# Altium PCB Fri3d_2026_Keeb_00.PcbDoc (part 2 of 2)
Units mm, origin at the board's own origin, x right, y up, seen from the top; angles counter-clockwise.
Board outline 99 x 106 mm, 2 copper layers (Top Layer, Bottom Layer), stack 1.571 mm thick; 46 components, 52 nets, 333 pads, 191 vias.
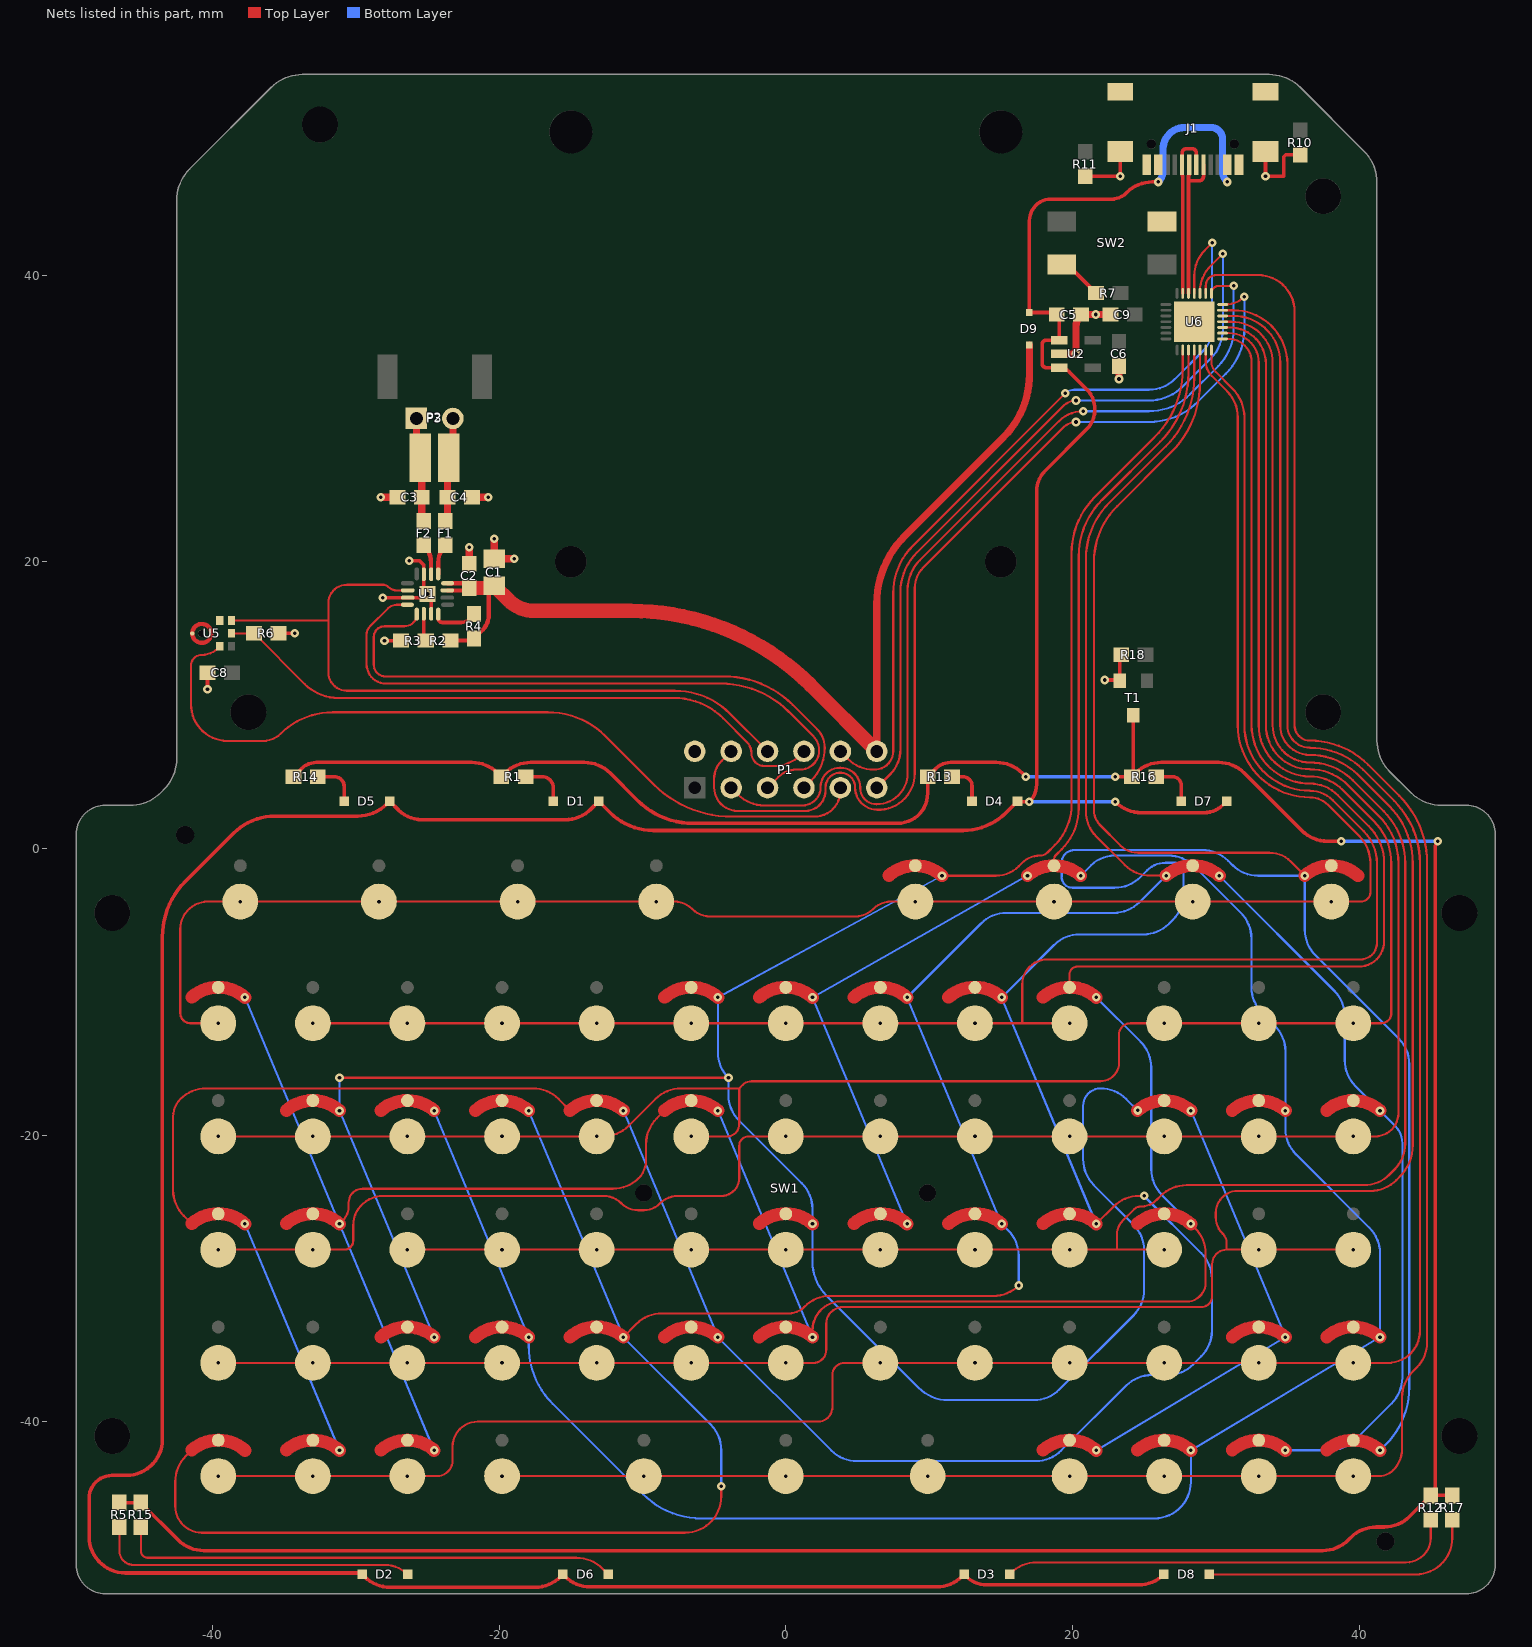
[diagram p2: the nets of this part, all layers, seen from the top]

## Via types
v1: diameter 0.6, hole 0.25, Top Layer to Bottom Layer, 191 vias

## Nets (pads, with @x,y where several pads share a name; then routed paths per layer and width w, separated by ;. In a path a pad name is that pad's centre, name@x,y a point inside that pad or via, vN(x,y) a via of type N, cw(c..) or ccw(c..) an arc to the next point about the centre after c; other vN are vias at no path point) (continued)
COL4: SW1.9 SW1.27 SW1.45 SW1.63 SW1.81 SW1.99 SW1.117 SW1.135 U6.9 | length 214.5
  Top Layer w0.15: v1(-31.138,-16) v1(-4,-16) ; v1(10.902,-1.91) 14.656,-1.91 ccw(c14.656,0.344) 16.25,-1.25 16.47,-1.03 cw(c17.75,-2.311) 17.75,-0.5 ccw(c17.75,0.222) 18.26,-0.289 18.756,0.207 ccw(c15.898,3.065) 19.94,3.065 19.94,20.6 cw(c25.484,20.6) 21.564,24.52 25.719,28.675 ccw(c20.935,33.459) 27.7,33.459 U6.9@27.7,34.775
  Bottom Layer w0.15: v1(-31.138,-16) v1(-31.138,-18.3) v1(-24.538,-34.1) ; v1(10.902,-1.91) v1(-4.738,-10.4) -4.738,-14.219 ccw(c-2.219,-14.219) v1(-4,-16) -4,-17.198 ccw(c-1.46,-17.198) -3.256,-18.994 1.118,-23.368 cw(c-0.678,-25.164) 1.862,-25.164 v1(1.862,-26.2) 1.862,-28.821 ccw(c5.28,-28.821) 2.863,-31.238 9.263,-37.638 ccw(c11.345,-35.556) 11.345,-38.5 17.295,-38.5 ccw(c17.295,-35.96) 19.091,-37.756 24.256,-32.591 ccw(c22.46,-30.795) 25,-30.795 25,-28.052 ccw(c22.46,-28.052) 24.256,-26.256 21.494,-23.494 cw(c23.29,-21.698) 20.75,-21.698 20.75,-17.96 cw(c21.96,-17.96) 21.96,-16.75 cw(c21.96,-19.29) 23.756,-17.494 v1(24.549,-18.287) ; v1(21.662,-42) v1(34.862,-34.1) v1(28.262,-18.3)
COL5: SW1.11 SW1.29 SW1.47 SW1.65 SW1.83 SW1.101 SW1.119 SW1.137 U6.10 | length 208.7
  Top Layer w0.15: SW1.11@18.715,-1.209 18.715,-1.2 18.715,-0.787 cw(c19.173,-0.787) 18.849,-0.463 19.256,-0.056 ccw(c16.398,2.802) 20.44,2.802 20.44,20.393 cw(c25.984,20.393) 22.064,24.313 26.119,28.368 ccw(c21.335,33.152) 28.1,33.152 U6.10@28.1,34.775
  Bottom Layer w0.15: v1(-24.538,-18.3) v1(-17.938,-34.1) -17.938,-34.71 ccw(c-12.215,-34.71) -16.262,-38.757 -9.945,-45.074 ccw(c-5.898,-41.027) -5.898,-46.75 25.722,-46.75 ccw(c25.722,-44.21) 28.262,-44.21 v1(28.262,-42) v1(41.462,-34.1) 41.462,-28.264 ccw(c38.922,-28.264) 40.718,-26.468 35.606,-21.356 cw(c37.402,-19.56) 34.862,-19.56 v1(34.862,-18.3) 34.862,-14.164 ccw(c32.322,-14.164) 34.118,-12.368 33.238,-11.488 cw(c35.034,-9.692) 32.494,-9.692 32.494,-6.297 ccw(c29.954,-6.297) 31.75,-4.5 28.494,-1.244 ccw(c26.698,-3.04) 26.698,-0.5 22.948,-0.5 ccw(c22.948,-2.819) 21.308,-1.179 v1(20.577,-1.91) ; v1(8.462,-26.2) v1(1.862,-10.4) v1(16.864,-1.896)
COL6: SW1.13 SW1.31 SW1.49 SW1.67 SW1.85 SW1.103 SW1.121 SW1.139 U6.11 | length 241
  Top Layer w0.15: -41.451,-41.987 -41.861,-42.396 ccw(c-40.065,-44.192) -42.605,-44.192 -42.605,-45.895 ccw(c-40.75,-45.895) -40.75,-47.75 -7.04,-47.75 ccw(c-7.04,-45.21) -4.5,-45.21 v1(-4.5,-44.5) ; v1(-11.338,-34.1) -10.428,-33.19 cw(c-8.632,-34.986) -8.632,-32.446 0.213,-32.446 ccw(c0.213,-30.943) 1.276,-32.006 1.312,-31.97 cw(c3.108,-33.766) 3.108,-31.226 14.498,-31.226 ccw(c14.498,-28.748) v1(16.25,-30.5) ; v1(26.539,-1.897) 25.449,-1.897 cw(c25.449,0.643) 23.653,-1.153 21.684,0.816 cw(c23.48,2.612) 20.94,2.612 20.94,20.186 cw(c26.484,20.186) 22.564,24.106 26.519,28.061 ccw(c21.735,32.844) 28.5,32.844 U6.11@28.5,34.775 ; SW1.13@28.39,-1.209 SW1.13@28.39,-1.2
  Bottom Layer w0.15: v1(-17.938,-18.3) v1(-11.338,-34.1) -5.244,-40.194 cw(c-7.04,-41.99) -4.5,-41.99 v1(-4.5,-44.5) ; v1(16.25,-30.5) 16.25,-28.44 ccw(c13.71,-28.44) 15.506,-26.644 v1(15.062,-26.2) v1(8.462,-10.4) 13.618,-5.244 cw(c15.415,-7.04) 15.415,-4.5 22.883,-4.5 ccw(c22.883,-1.96) 24.679,-3.756 v1(26.539,-1.897) ; v1(30.252,-1.91) 38.256,-9.914 cw(c36.46,-11.71) 39,-11.71 39,-14.786 ccw(c41.54,-14.786) 39.744,-16.582 v1(41.462,-18.3) 42.506,-19.344 cw(c41.265,-20.585) 43.02,-20.585 43.02,-24.028 43.025,-24.033 43.025,-24.467 43.02,-24.472 43.02,-36.928 cw(c40.48,-36.928) 42.276,-38.724 39.744,-41.256 cw(c37.948,-39.46) 37.948,-42 v1(34.862,-42)
COL7: SW1.15 SW1.33 SW1.51 SW1.69 SW1.87 SW1.105 SW1.123 SW1.141 U6.12 | length 287
  Top Layer w0.15: -41.451,-26.187 -42.006,-25.632 cw(c-40.21,-23.836) -42.75,-23.836 -42.75,-18.716 cw(c-41.022,-18.716) -42.244,-17.494 cw(c-40.448,-19.29) -40.448,-16.75 -17.64,-16.75 cw(c-17.64,-19.29) -15.844,-17.494 -15.051,-18.287 ; v1(21.662,-26.2) 22.868,-24.994 cw(c24.665,-26.79) 24.665,-24.25 v1(25,-24.25) ; U6.12@28.9,34.775 28.9,32.452 cw(c22.135,32.452) 26.919,27.669 23.124,23.874 ccw(c27.044,19.953) 21.5,19.953 21.5,2.696 ccw(c23.053,2.696) 21.955,1.598 23.344,0.209 ccw(c24.573,1.439) 24.573,-0.3 33.752,-0.3 cw(c33.752,-2.388) 35.229,-0.912 v1(36.214,-1.897) ; SW1.15@38.056,-1.2 SW1.15@38.065,-1.209
  Bottom Layer w0.15: v1(-37.738,-26.2) v1(-31.138,-42) ; v1(-11.338,-18.3) v1(-4.738,-34.1) 3.168,-42.006 ccw(c4.964,-40.21) 4.964,-42.75 17.433,-42.75 ccw(c17.433,-40.21) 19.229,-42.006 23.741,-37.494 cw(c25.537,-39.29) 25.537,-36.75 26.63,-36.75 ccw(c26.63,-34.21) 28.426,-36.006 28.992,-35.44 ccw(c27.196,-33.644) 29.736,-33.644 29.736,-30.038 ccw(c27.196,-30.038) 28.992,-28.242 v1(25,-24.25) ; v1(21.662,-26.2) v1(15.062,-10.4) 18.718,-6.744 cw(c20.515,-8.54) 20.515,-6 24.948,-6 ccw(c24.948,-3.46) 26.744,-5.256 27.006,-4.994 ccw(c25.21,-3.198) 27.75,-3.198 27.75,-1.618 ccw(c27.132,-1.618) 27.132,-1 26.5,-1 ccw(c26.5,-2.811) 25.22,-1.53 24.744,-2.006 cw(c22.948,-0.21) 22.948,-2.75 20,-2.75 cw(c20,-2) 19.25,-2 19.25,-1 cw(c20.132,-1) 20.132,-0.118 29.066,-0.118 cw(c29.066,-2.658) 30.862,-0.862 31.166,-1.166 ccw(c32.962,0.63) 32.962,-1.91 v1@36.214,-1.91 ; v1(36.214,-1.897) v1@36.214,-1.91 ; v1(41.462,-42) 41.843,-41.619 ccw(c37.829,-37.605) 43.506,-37.605 43.506,-15.058 ccw(c40.966,-15.058) 42.762,-13.262 36.958,-7.458 cw(c38.754,-5.662) 36.214,-5.662 v1@36.214,-1.91
COL8: SW1.17 SW1.35 SW1.53 SW1.71 SW1.89 SW1.107 SW1.125 U6.15 | length 204.3
  Top Layer w0.15: v1(-31.138,-26.2) -30.898,-25.96 ccw(c-31.858,-25) -30.5,-25 -30.5,-24.707 cw(c-29.543,-24.707) -29.543,-23.75 -12.052,-23.75 ccw(c-12.052,-21.21) -10.256,-23.006 ccw(c-11.478,-21.784) -9.75,-21.784 -9.75,-20.637 cw(c-7.21,-20.637) -9.006,-18.841 -8.451,-18.287 ; v1(1.862,-34.1) 1.862,-33.638 cw(c3.9,-33.638) 3.584,-31.625 27.971,-31.625 ccw(c27.971,-30.301) 29.294,-30.301 29.294,-28.284 ccw(c26.754,-28.284) 28.55,-26.488 v1(28.262,-26.2) ; SW1.35@19.8,-9.699 19.8,-9.69 19.8,-8.79 cw(c20.34,-8.79) 20.34,-8.25 39.978,-8.25 ccw(c39.978,-6.478) 41.75,-6.478 41.75,-1.028 ccw(c38.11,-1.028) 40.684,1.546 38.515,3.715 ccw(c36.569,1.769) 36.569,4.521 cw(c36.569,8.59) 32.5,8.59 32.5,33.937 ccw(c30.887,33.937) 30.887,35.55 U6.15@30.475,35.55
  Bottom Layer w0.15: v1(-37.738,-10.4) v1(-31.138,-26.2) v1(-24.538,-42) ; v1(-4.738,-18.3) v1(1.862,-34.1) ; v1(21.662,-10.4) 24.756,-13.494 cw(c22.96,-15.29) 25.5,-15.29 25.5,-22.386 ccw(c28.04,-22.386) 26.244,-24.182 v1(28.262,-26.2)
ESP.IO2: P1.5 U1.16 | length 45
  Top Layer w0.15: U1.16@-26.4,17 -27.146,17 ccw(c-27.146,16.146) -27.75,16.75 -29.021,15.479 ccw(c-28.469,14.927) -29.25,14.927 -29.25,12.85 ccw(c-27.9,12.85) -27.9,11.5 -4.546,11.5 cw(c-4.546,4.749) 0.227,9.523 1.897,7.853 cw(c0.869,6.824) 2.323,6.824 cw(c0.999,6.824) 0.999,5.5 0.75,5.5 ccw(c0.75,3.689) -0.53,4.97 P1.5@-1.27,4.23
ESP.IO15: P1.8 R6.1 U5.6 | length 44.1
  Top Layer w0.15: U5.6@-38.676,15 R6.1@-37.1,15 -33.554,11.455 ccw(c-31.25,13.759) -31.25,10.5 -8.898,10.5 -7.811,10.5 cw(c-7.811,5.641) -4.375,9.077 -2.716,7.418 cw(c-3.487,6.646) -2.396,6.646 ccw(c-1.5,6.646) -1.5,5.75 -0.802,5.75 ccw(c-0.802,8.29) 0.994,6.494 P1.8@1.27,6.77
ESP.IO16: P1.7 U1.1 | length 43.2
  Top Layer w0.15: U1.1@-25.75,16.35 cw(c-26.6,16.35) -26.6,15.5 -28,15.5 ccw(c-28,14.75) -28.75,14.75 -28.75,12.81 ccw(c-27.94,12.81) -27.94,12 -4.296,12 cw(c-4.296,5.249) 0.477,10.023 2.189,8.311 cw(c0.907,7.029) 2.72,7.029 cw(c-0.537,7.029) 1.766,4.726 P1.7@1.27,4.23
ESP.IO17: P1.9 U5.4 | length 56.3
  Top Layer w0.15: U5.4@-39.498,14.1 -39.637,13.961 cw(c-40.75,15.074) -40.75,13.5 ccw(c-40.75,12.75) -41.5,12.75 -41.5,10.04 ccw(c-38.96,10.04) -38.96,7.5 -36.457,7.5 ccw(c-36.457,9.207) -35.25,8 cw(c-31.629,4.379) -31.629,9.5 -16.603,9.5 cw(c-16.603,3.818) -12.586,7.836 -9.237,4.487 ccw(c-3.75,9.975) -3.75,2.214 1.994,2.214 ccw(c1.994,4.032) P1.9@3.801,4.229
ESP.IO43: P1.3 U6.22 | length 65.9
  Top Layer w0.15: P1.3@-3.81,4.23 -3.324,3.744 ccw(c-1.528,5.54) -1.528,3 1.175,3 ccw(c1.175,4.25) 2.425,4.25 2.425,4.275 cw(c3.775,4.275) 3.775,5.625 3.825,5.625 cw(c3.825,4.25) 5.2,4.25 5.2,4.2 ccw(c6.325,4.2) 6.325,3.075 ccw(c6.325,5.25) 8.5,5.25 8.5,18.041 cw(c11.418,18.041) 9.355,20.105 19.043,29.793 ; 19.043,29.793 cw(c20.75,28.086) v1(20.75,30.5) ; U6.22@29.7,38.725 cw(c30.225,38.725) 30.225,39.25 v1(31.25,39.25)
  Bottom Layer w0.15: v1(20.75,30.5) 25.351,30.5 ccw(c25.351,34.54) 28.208,31.683 30.172,33.647 ccw(c27.569,36.25) 31.25,36.25 v1(31.25,39.25)
ESP.IO44: P1.4 U6.21 | length 70.8
  Top Layer w0.15: P1.4@-3.81,6.77 -4.468,6.112 ccw(c-3.184,4.828) -5,4.828 -5,4.255 ccw(c-3.358,4.255) -3.358,2.614 1.364,2.614 ccw(c1.364,4.02) 2.77,4.02 2.77,4.25 cw(c3.802,4.25) 4.834,4.25 ccw(c6.389,4.25) 6.367,2.695 ; 6.389,2.695 cw(c6.389,4.25) 6.367,2.695 ; v1(20.25,29.75) ccw(c20.25,28.543) 19.396,29.396 9.598,19.598 ccw(c11.042,18.154) 9,18.154 9,5.233 cw(c6.46,5.233) 6.367,2.695 ; U6.21@30.475,37.95 30.672,37.95 ccw(c30.672,39.828) v1(32,38.5)
  Bottom Layer w0.15: v1(20.25,29.75) 25.351,29.75 ccw(c25.351,34.54) 28.738,31.153 30.702,33.117 ccw(c27.569,36.25) 32,36.25 v1(32,38.5)
ESP.IO47: P1.6 U1.14 U5.1 | length 50.9
  Top Layer w0.15: U5.1@-38.676,15.9 -31.92,15.9 ; U1.14@-26.375,18 -27.146,18 cw(c-27.146,18.854) -27.75,18.25 ccw(c-28.112,17.888) -28.112,18.4 -30.626,18.4 ccw(c-30.626,17.106) -31.92,17.106 -31.92,15.9 ; P1.6@-1.27,6.77 -3.926,9.426 ccw(c-7.726,5.625) -7.726,11 -30.63,11 cw(c-30.63,12.29) -31.92,12.29 -31.92,15.9
GND: C1.2 C2.2 C3.2 C4.2 C5.2 C6.2 C8.2 C9.2 J1.A1 J1.A12 J1.B1 J1.B12 J1.MH1 J1.MH2 J1.MH3 J1.MH4 P1.2 R3.2 R6.2 R10.2 R11.2 R18.2 T1.2 U1.3 U1.11 U1.15 U1.17 U2.2 U5.2 U5.3 U6.29 | length 37.2
  Top Layer w0.25: v1(-40.35,11.1) C8.2@-40.35,12.25 ; R6.2@-35.4,15 v1(-34.25,15) ; v1(-28.112,17.5) U1.15@-26.375,17.5 -25.25,17.5 v1(-25,17.75) ; v1(-28,14.5) R3.2@-26.85,14.5 ; v1(-26.283,20.082) -25.586,20.082 -25.25,19.746 U1.11@-25.25,19.125 -25.25,18 v1(-25,17.75) ; U1.3@-24.75,16.375 -24.75,17.5 v1(-25,17.75) ; R11.2@20.9,46.9 v1(23.33,46.9) J1.MH4@23.33,48.618 ; v1(22.25,11.75) T1.2@23.3,11.75 ; T1.2@23.3,11.7 23.3,13.4 cw(c23.4,13.4) R18.2@23.4,13.5 ; J1.MH1@33.47,48.618 v1(33.47,46.9) 34.75,46.9 34.75,48.25 34.9,48.4 R10.2@35.9,48.4
  Top Layer w0.5: v1(-28.25,24.5) C3.2@-27.1,24.5 ; C2.2@-22.087,19.863 v1(-22.087,21.013) ; C4.2@-21.9,24.5 v1(-20.75,24.5) ; v1(-20.337,21.613) C1.2@-20.337,20.213 v1(-18.937,20.213) ; U2.2@19.075,34.5 v1(20.25,34.5) 20.25,36.405 cw(c21.445,36.405) C5.2@20.6,37.25 C9.2@22.65,37.25 ; v1(23.25,32.75) C6.2@23.25,33.65
  other v1: 28.5,36.75 21.625,37.25
I2C.SCL: P1.11 U6.24 | length 54.1
  Top Layer w0.15: P1.11@6.35,4.23 7.272,5.152 ccw(c5.513,6.91) 8,6.91 8,17.892 cw(c11.882,17.892) 9.137,20.637 19.396,30.896 cw(c20.25,30.043) v1(20.25,31.25) ; U6.24@28.9,38.725 28.9,38.848 cw(c31.44,38.848) 29.644,40.644 v1(30.5,41.5)
  Bottom Layer w0.15: v1(20.25,31.25) 25.351,31.25 ccw(c25.351,34.54) 27.678,32.214 29.641,34.177 ccw(c27.569,36.25) 30.5,36.25 v1(30.5,41.5)
I2C.SDA: P1.10 U6.25 | length 56.9
  Top Layer w0.15: P1.10@3.81,6.77 4.336,6.244 ccw(c6.132,8.04) 6.132,5.5 ccw(c6.207,6.791) 7.5,6.791 7.5,17.803 cw(c12.2,17.803) 8.876,21.126 v1(19.5,31.75) ; U6.25@28.5,38.725 28.5,39.948 cw(c31.04,39.948) 29.244,41.744 v1(29.75,42.25)
  Bottom Layer w0.15: v1(19.5,31.75) cw(c20.104,31.146) 20.104,32 25.351,32 ccw(c25.351,34.54) 27.147,32.744 29.111,34.708 ccw(c27.569,36.25) 29.75,36.25 v1(29.75,42.25)
NetD1_2: D1.2 R1.1 | length 3.3
  Top Layer w0.25: R1.1@-18.15,5 -17,5 cw(c-17,4.215) -16.215,4.215 D1.2@-16.215,3.291
NetD2_2: D2.2 R5.1 | length 22.5
  Top Layer w0.15: R5.1@-46.5,-47.35 -46.5,-49 ccw(c-45.5,-49) -45.5,-50 -27.976,-50 cw(c-27.976,-52.25) D2.2@-26.385,-50.659
NetD3_2: D3.2 R12.1 | length 31.9
  Top Layer w0.15: D3.2@15.615,-50.659 15.71,-50.564 cw(c17.506,-52.36) 17.506,-49.82 43.286,-49.82 ccw(c43.286,-48.106) 45,-48.106 R12.1@45,-46.85
NetD4_2: D4.2 R13.1 | length 2.8
  Top Layer w0.25: R13.1@11.6,5 12.362,5 cw(c12.362,4.367) 12.995,4.367 D4.2@12.995,3.291
NetD5_2: D5.2 R14.1 | length 3.3
  Top Layer w0.25: R14.1@-32.65,5 -31.5,5 cw(c-31.5,4.315) -30.815,4.315 D5.2@-30.815,3.291
NetD6_2: D6.2 R15.1 | length 34.9
  Top Layer w0.15: R15.1@-45,-47.35 -45,-49 ccw(c-44.5,-49) -44.5,-49.5 -14.596,-49.5 cw(c-14.596,-52.04) -12.8,-50.244 D6.2@-12.385,-50.659
NetD7_2: D7.2 R16.1 | length 3.2
  Top Layer w0.25: R16.1@25.85,5 27,5 cw(c27,4.405) 27.595,4.405 D7.2@27.595,3.291
NetD8_2: D8.2 R17.1 | length 19.7
  Top Layer w0.15: D8.2@29.555,-50.659 43.96,-50.659 ccw(c43.96,-48.119) 46.5,-48.119 R17.1@46.5,-46.85
NetF1_1: F1.1 U1.9 | length 2.1
  Top Layer w0.3: U1.9@-24.25,19.15 -24.25,19.943 cw(c-22.543,19.943) F1.1@-23.75,21.15
NetF2_1: F2.1 U1.10 | length 2.2
  Top Layer w0.3: F2.1@-25.25,21.15 cw(c-26.457,19.943) -24.75,19.943 U1.10@-24.75,19.125
NetR1_2: R1.2 R5.2 R12.2 R13.2 R14.2 R15.2 R16.2 R17.2 T1.3 | length 233.3
  Top Layer w0.25: R5.2@-46.5,-45.65 R15.2@-45,-45.65 -42.394,-48.256 ccw(c-40.598,-46.46) -40.598,-49 37.448,-49 ccw(c37.448,-46.46) 39.244,-48.256 39.406,-48.094 cw(c41.202,-49.89) 41.202,-47.35 41.748,-47.35 ccw(c41.748,-44.81) 43.544,-46.606 R12.2@45,-45.15 ; R14.2@-34.35,5 -33.774,5.576 cw(c-32.75,4.551) -32.75,6 -21.902,6 cw(c-21.902,3.46) -20.106,5.256 R1.2@-19.85,5 -19.594,5.256 cw(c-17.798,3.46) -17.798,6 -14.052,6 cw(c-14.052,3.46) -12.256,5.256 -10.356,3.356 ccw(c-6.478,7.234) -6.478,1.75 7.813,1.75 ccw(c7.813,3.837) 9.9,3.837 R13.2@9.9,5 10.476,5.576 cw(c11.5,4.551) 11.5,6 14.698,6 cw(c14.698,3.46) 16.494,5.256 v1(16.75,5) ; v1(23,5) R16.2@24.15,5 ; T1.3@24.25,9.3 24.25,5.1 cw(c24.15,5.1) R16.2@24.15,5 ; v1(38.75,0.5) 37.802,0.5 cw(c37.802,3.04) 36.006,1.244 31.994,5.256 ccw(c30.198,3.46) 30.198,6 26.202,6 ccw(c26.202,3.46) 24.406,5.256 R16.2@24.15,5 ; v1(45.5,0.5) ccw(c45.946,0.054) 45.315,0.054 45.315,-44.389 cw(c44.239,-44.389) R12.2@45,-45.15 ; R17.2@46.5,-45.15 R12.2@45,-45.15
  Bottom Layer w0.25: v1(16.75,5) v1(23,5) ; v1(38.75,0.5) v1(45.5,0.5)
NetR2_1: R2.1 R3.1 U1.2 | length 1.9
  Top Layer w0.25: U1.2@-25.25,16.375 -25.25,14.6 R3.1@-25.15,14.5
NetR7_2: R7.2 SW2.1@19.25,40.75 | length 3.2
  Top Layer w0.25: SW2.1@19.25,40.75 cw(c19.25,39.785) 19.933,40.467 R7.2@21.65,38.75
ROW0: SW1.2 SW1.4 SW1.6 SW1.8 SW1.10 SW1.12 SW1.14 SW1.16 SW1.18 U6.13 | length 137.4
  Top Layer w0.15: v1(-39.6,-12.2) -41.55,-12.2 cw(c-41.55,-11.5) -42.25,-11.5 -42.25,-5.645 cw(c-40.315,-5.645) -40.315,-3.71 v1(-38.06,-3.71) v1(-28.385,-3.71) v1(-18.71,-3.71) v1(-9.035,-3.71) -7.788,-3.71 cw(c-7.788,-5.485) -6.533,-4.23 ccw(c-5.277,-2.975) -6.532,-4.231 ccw(c-5.277,-2.975) -5.277,-4.75 4.841,-4.75 ccw(c4.841,-2.975) 6.096,-4.23 cw(c7.352,-5.485) 6.097,-4.229 cw(c7.352,-5.485) 7.352,-3.71 v1(9.04,-3.71) v1(18.715,-3.71) v1(28.39,-3.71) v1(38.065,-3.71) 40.139,-3.71 ccw(c40.139,-3.059) 40.79,-3.059 40.79,-1.028 ccw(c38.11,-1.028) 40.005,0.867 37.836,3.036 ccw(c36.569,1.769) 36.569,3.561 cw(c36.569,8.59) 31.54,8.59 31.54,30.092 ccw(c29,30.092) 30.796,31.888 29.717,32.967 cw(c30.724,33.974) 29.3,33.974 U6.13@29.3,34.775
ROW1: SW1.20 SW1.22 SW1.24 SW1.26 SW1.28 SW1.30 SW1.32 SW1.34 SW1.36 U6.14 | length 128.9
  Top Layer w0.15: v1(-33,-12.2) v1(-26.4,-12.2) v1(-19.8,-12.2) v1(-13.2,-12.2) v1(-6.6,-12.2) v1(0,-12.2) v1(6.6,-12.2) v1(13.2,-12.2) 16.5,-12.2 ; v1(19.8,-12.2) 16.5,-12.2 ; U6.14@29.7,34.775 29.7,33.974 ccw(c30.724,33.974) 30,33.25 31.168,32.082 cw(c29.16,30.074) 32,30.074 32,8.59 ccw(c36.569,8.59) 36.569,4.021 cw(c36.569,1.769) 38.161,3.362 40.33,1.192 cw(c38.11,-1.028) 41.25,-1.028 41.25,-6.606 cw(c40.106,-6.606) 40.106,-7.75 18.25,-7.75 ccw(c18.25,-9.5) 16.5,-9.5 16.5,-12.2
ROW2: SW1.38 SW1.40 SW1.42 SW1.44 SW1.46 SW1.48 SW1.50 SW1.52 SW1.54 U6.16 | length 147
  Top Layer w0.15: v1(-39.6,-20.1) v1(-33,-20.1) v1(-26.4,-20.1) v1(-19.8,-20.1) v1(-13.2,-20.1) -12.758,-20.1 ccw(c-12.758,-17.56) -10.962,-19.356 -9.1,-17.494 cw(c-7.304,-19.29) -7.304,-16.75 -3.25,-16.75 ; v1(-6.6,-20.1) -4.1,-20.1 ccw(c-4.1,-19.25) -3.25,-19.25 -3.25,-16.75 ; U6.16@30.475,35.95 30.935,35.95 cw(c30.935,33.885) 33,33.885 33,8.59 ccw(c36.569,8.59) 36.569,5.021 cw(c36.569,1.769) 38.868,4.069 41.037,1.9 cw(c38.11,-1.028) 42.25,-1.028 42.25,-11.5 cw(c41.55,-11.5) 41.55,-12.2 v1(39.6,-12.2) v1(33,-12.2) v1(26.4,-12.2) 24.05,-12.2 ccw(c24.05,-13) 23.25,-13 23.25,-14.957 cw(c21.957,-14.957) 23.205,-15.295 cw(c21.957,-14.957) 22.295,-16.205 cw(c21.957,-14.957) 21.957,-16.25 -2.396,-16.25 ccw(c-2.396,-17.104) -3,-16.5 -3.25,-16.75
ROW3: SW1.56 SW1.58 SW1.60 SW1.62 SW1.64 SW1.66 SW1.68 SW1.70 SW1.72 U6.17 | length 151.4
  Top Layer w0.15: v1(-39.6,-28) v1(-33,-28) -30.812,-28 ccw(c-30.812,-27.368) -30.18,-27.368 -30.18,-26.321 cw(c-28.109,-26.321) -28.109,-24.25 -12.707,-24.25 cw(c-12.707,-25.957) -11.501,-24.749 ; -11.5,-24.75 ccw(c-10.293,-23.543) -10.293,-25.25 -9.906,-25.25 ccw(c-9.906,-23.667) -8.786,-24.786 -8.75,-24.75 cw(c-7.543,-25.957) -7.543,-24.25 -4.5,-24.25 ccw(c-4.5,-23) -3.25,-23 -3.25,-20.75 cw(c-2.6,-20.75) -2.6,-20.1 v1(0,-20.1) v1(6.6,-20.1) v1(13.2,-20.1) v1(19.8,-20.1) v1(26.4,-20.1) v1(33,-20.1) v1(39.6,-20.1) 41.121,-20.1 ccw(c41.121,-18.471) 42.75,-18.471 42.75,-1.028 ccw(c38.11,-1.028) 41.391,2.253 39.222,4.422 ccw(c36.569,1.769) 36.569,5.521 cw(c36.569,8.59) 33.5,8.59 33.5,33.81 ccw(c30.96,33.81) 30.96,36.35 U6.17@30.475,36.35
ROW4: SW1.74 SW1.76 SW1.78 SW1.80 SW1.82 SW1.84 SW1.86 SW1.88 SW1.90 U6.18 | length 141.5
  Top Layer w0.15: v1(-26.4,-28) v1(-19.8,-28) v1(-13.2,-28) v1(-6.6,-28) v1(0,-28) v1(6.6,-28) v1(13.2,-28) v1(19.8,-28) 23.1,-28 ; 23.528,-25.959 ccw(c24.564,-26.993) 23.1,-26.993 23.1,-28 ; 23.529,-25.958 24.306,-25.181 cw(c24.744,-25.619) 24.744,-25 ccw(c24.744,-23.415) 25.025,-24.975 ccw(c24.744,-23.415) 25.864,-24.536 26.156,-24.244 cw(c27.952,-26.04) 27.952,-23.5 40.331,-23.5 ccw(c40.331,-20.96) 42.127,-22.756 42.477,-22.405 ccw(c40.681,-20.609) 43.221,-20.609 43.221,-1.028 ccw(c38.11,-1.028) 41.724,2.586 39.555,4.755 ccw(c36.569,1.769) 36.569,5.992 cw(c36.569,8.59) 33.971,8.59 33.971,33.873 ccw(c31.094,33.873) 31.094,36.75 U6.18@30.475,36.75 ; v1(26.4,-28) 23.1,-28
ROW5: SW1.92 SW1.94 SW1.96 SW1.98 SW1.100 SW1.102 SW1.104 SW1.106 SW1.108 U6.19 | length 170
  Top Layer w0.15: v1(-39.6,-35.9) v1(-33,-35.9) v1(-26.4,-35.9) v1(-19.8,-35.9) v1(-13.2,-35.9) v1(-6.6,-35.9) v1(0,-35.9) 1.921,-35.9 ccw(c1.921,-34.994) 2.827,-34.994 2.827,-33.173 cw(c4,-33.173) 4,-32 29,-32 ccw(c29,-31.25) 29.75,-31.25 29.75,-29 cw(c30.75,-29) 30.75,-28 ; U6.19@30.475,37.15 31.25,37.15 cw(c31.25,33.9) 34.5,33.9 34.5,8.59 ccw(c36.569,8.59) 36.569,6.521 cw(c36.569,1.769) 39.929,5.129 42.098,2.96 cw(c38.11,-1.028) 43.75,-1.028 43.75,-20.696 cw(c40.603,-20.696) 42.828,-22.922 42.594,-23.156 cw(c40.798,-21.36) 40.798,-23.9 31.545,-23.9 ccw(c31.545,-25.445) 30,-25.445 30,-25.738 ccw(c31.599,-25.738) 30.468,-26.868 30.503,-26.903 cw(c29.905,-27.5) 30.75,-27.5 30.75,-28 ; v1(39.6,-28) v1(33,-28) 30.75,-28
ROW6: SW1.110 SW1.112 SW1.114 SW1.116 SW1.118 SW1.120 SW1.122 SW1.124 SW1.126 U6.20 | length 170
  Top Layer w0.15: v1(-39.6,-43.8) v1(-33,-43.8) v1(-26.4,-43.8) ; SW1.126@-26.4,-43.801 -24.355,-43.801 ccw(c-24.355,-42.696) -23.25,-42.696 -23.25,-41.748 cw(c-21.502,-41.748) -21.502,-40 2.25,-40 ccw(c2.25,-39) 3.25,-39 3.25,-36.75 cw(c4.1,-36.75) 4.1,-35.9 v1(6.6,-35.9) v1(13.2,-35.9) v1(19.8,-35.9) v1(26.4,-35.9) v1(33,-35.9) v1(39.6,-35.9) 42.022,-35.9 ccw(c42.022,-33.672) 44.25,-33.672 44.25,-1.827 44.25,-1.028 ccw(c38.11,-1.028) 42.452,3.314 40.283,5.483 ccw(c36.569,1.769) 36.569,7.021 cw(c36.569,8.59) 35,8.59 35,33.788 ccw(c31.238,33.788) 31.238,37.55 U6.20@30.475,37.55
ROW7: SW1.128 SW1.130 SW1.132 SW1.134 SW1.136 SW1.138 SW1.140 SW1.142 U6.23 | length 157.3
  Top Layer w0.15: SW1.128@-19.8,-43.801 v1(-9.9,-43.801) v1(0,-43.801) v1(9.9,-43.801) v1(19.8,-43.801) v1(26.4,-43.801) v1(33,-43.801) v1(39.6,-43.801) 41.38,-43.801 ccw(c41.38,-42.392) 42.377,-43.388 ccw(c40.873,-41.884) 43,-41.884 43,-38.302 cw(c45.54,-38.302) 43.744,-36.506 44.006,-36.244 ccw(c42.21,-34.448) 44.75,-34.448 44.75,-33.462 ; U6.23@29.3,38.725 29.3,39.264 cw(c30.036,39.264) 30.036,40 32.96,40 cw(c32.96,37.46) 35.5,37.46 35.5,8.59 ccw(c36.569,8.59) 36.569,7.521 cw(c36.569,1.769) 40.636,5.836 42.805,3.667 cw(c38.11,-1.028) 44.75,-1.028 44.75,-1.827 44.75,-33.459
  other v1: -19.8,-43.8
S\D\_\M\O\D\E\: R4.2 U1.4 | length 3.2
  Top Layer w0.25: U1.4@-24.25,16.35 -24.25,16.05 ccw(c-23.962,16.05) -23.962,15.762 -22.63,15.762 ccw(c-22.63,16.548) -22.074,15.992 cw(c-21.992,15.992) -22.05,16.05 R4.2@-21.75,16.35
SPK_N: C3.1 F2.2 P2.2 P3.1 | length 7.3
  Top Layer w0.5: P3.1@-25.77,30 -25.77,27.902 ccw(c-24.848,27.902) P2.2@-25.5,27.25 cw(c-25.742,27.008) -25.4,27.008 C3.1@-25.4,24.5 -25.4,23.212 ccw(c-24.888,23.212) F2.2@-25.25,22.85
SPK_P: C4.1 F1.2 P2.1 P3.2 | length 7.3
  Top Layer w0.5: F1.2@-23.75,22.85 ccw(c-24.112,23.212) -23.6,23.212 C4.1@-23.6,24.5 -23.6,27.008 cw(c-23.258,27.008) P2.1@-23.5,27.25 ccw(c-24.152,27.902) -23.23,27.902 P3.2@-23.23,30
USB.D_n: J1.A7 J1.B7 U6.26 | length 11
  Top Layer w0.25: U6.26@28.1,38.725 28.1,46.5 28.1,46.925 ccw(c27.979,47.046) 28.15,47.046 J1.A7@28.15,47.703 ; 28.1,46.575 28.825,46.575 ccw(c28.825,46.9) 29.15,46.9 J1.B7@29.15,47.703
USB.D_p: J1.A6 J1.B6 SW2.2@26.25,43.75 U6.27 | length 12
  Top Layer w0.25: U6.27@27.7,38.725 27.7,46.925 cw(c27.821,47.046) 27.65,47.046 J1.B6@27.65,47.703 27.65,48.505 cw(c27.975,48.505) 27.975,48.83 28.325,48.83 cw(c28.325,48.505) 28.65,48.505 J1.A6@28.65,47.703
VSYS: C1.1 C2.1 D9.A P1.12 R2.2 R4.1 U1.7 U1.8 | length 73.7
  Top Layer w0.25: C1.1@-20.722,17.928 -20.478,18.172 C1.1@-20.337,18.313
  Top Layer w0.3: U1.7@-23.625,18 -22.25,18 ccw(c-22.25,18.163) C2.1@-22.087,18.163 ccw(c-22.424,18.163) -22.424,18.5 U1.8@-23.6,18.5 ; R2.2@-23.4,14.5 -22.112,14.5 ccw(c-22.112,15.012) R4.1@-21.75,14.65 -21.151,15.249 ccw(c-22.188,16.285) -20.722,16.285 C1.1@-20.722,17.928
  Top Layer w0.5: C2.1@-22.087,18.163 cw(c-21.937,18.163) C2.1@-21.937,18.313 ; P1.12@6.35,6.77 6.35,17.077 cw(c13.044,17.077) 8.311,21.811 15.189,28.689 ccw(c10.818,33.061) 17,33.061 D9.A@17,35.11
  Top Layer w1: C2.1@-22.078,18.172 C1.1@-20.478,18.172 ; C1.1@-20.25,18.226 -19.34,17.317 ccw(c-17.544,19.113) -17.544,16.573 -10.814,16.573 cw(c-10.814,-1.2) 1.753,11.367 P1.12@6.35,6.77
VUSB: C5.1 D1.1 D2.1 D3.1 D4.1 D5.1 D6.1 D7.1 D8.1 D9.C J1.A4 J1.A9 J1.B4 J1.B9 U2.1 U2.3 | length 273.1
  Top Layer w0.25: D5.1@-27.842,3.094 cw(c-29.879,5.131) -29.879,2.25 -33.717,2.25 -35.638,2.25 ccw(c-35.638,-1.883) -38.561,1.039 -41.888,-2.288 ccw(c-37.995,-6.18) -43.5,-6.18 -43.5,-41.233 cw(c-46.02,-41.233) -46.02,-43.753 -47.016,-43.753 ccw(c-47.016,-45.35) -48.612,-45.35 -48.612,-48.019 ccw(c-46.072,-48.019) -46.072,-50.559 -29.655,-50.559 D2.1@-29.555,-50.659 -29.405,-50.81 ccw(c-27.609,-49.014) -27.609,-51.554 -17.501,-51.554 ccw(c-17.501,-49.014) -15.705,-50.81 D6.1@-15.555,-50.659 -15.432,-50.782 ccw(c-13.636,-48.986) -13.636,-51.526 10.527,-51.526 ccw(c10.527,-48.986) 12.323,-50.782 12.451,-50.654 ccw(c14.099,-49.248) 13.805,-51.394 24.61,-51.394 ccw(c24.61,-48.884) D8.1@26.385,-50.659 ; D5.1@-27.64,3.291 -27.028,2.679 ccw(c-25.389,4.318) -25.389,2 -15.388,2 ccw(c-15.388,4.54) -13.592,2.744 D1.1@-13.045,3.291 -12.248,2.494 ccw(c-9.245,5.497) -9.245,1.25 12.365,1.25 ccw(c12.365,5.497) 15.368,2.494 D4.1@16.165,3.291 ccw(c16.264,3.39) 16.264,3.25 v1(17,3.25) ccw(c15.793,4.457) 17.5,4.457 17.5,24.896 cw(c19.561,24.896) 18.104,26.354 20.988,29.238 ccw(c19.585,30.64) 20.949,32.08 19.765,33.264 ccw(c19.075,32.575) U2.3@19.075,33.55 18.152,33.55 cw(c18.152,33.802) 17.9,33.802 17.9,35.198 cw(c18.152,35.198) 18.152,35.45 U2.1@19.075,35.45 19.075,37.25 C5.1@18.9,37.25 18.9,37.39 D9.C@17,37.39 17,43.8 cw(c18.5,43.8) 18.5,45.3 22.724,45.3 ccw(c22.724,46.751) 23.75,45.725 23.781,45.756 cw(c25.577,43.96) 25.577,46.5 v1(26,46.5) ; v1(23,3.25) 23.015,3.235 ccw(c24.811,5.031) 24.811,2.491 29.18,2.491 ccw(c29.18,4.386) 30.52,3.046 D7.1@30.765,3.291
  Bottom Layer w0.25: v1(17,3.25) v1(23,3.25)
  Bottom Layer w0.5: v1(26,46.5) ccw(c25.215,47.285) 26.325,47.285 26.325,48.8 cw(c27.825,48.8) 27.825,50.3 29.675,50.3 cw(c29.675,49.5) 30.475,49.5 30.475,47.285 ccw(c31.585,47.285) v1(30.8,46.5)
pads on no net: J1.0 J1.A8 J1.B8 P2.M1 P2.M2 SW1.0 SW2.1@26.25,40.75 SW2.2@19.25,43.75 U1.5 U1.6 U1.12 U1.13 U2.4 U6.3

## Polygon pours and split planes (outlines as drawn)
GND on Top Layer "NONET_L-01_P-001" (solid, remove dead copper, pour order 0): -49.5,-52 -49.5,54 49.5,54 49.5,-52
GND on Bottom Layer "NONET_L-01_P-001" (solid, remove dead copper, pour order 1): -49.5,-52 -49.5,54 49.5,54 49.5,-52

## Other copper
Top Layer:
  rectangle net USB.D_p: 25.25,43 27.801,44.5
  region net GND: 31.325,48.425 31.325,46.975 35,46.975 35,48.875 34.631,49.244 ccw(c34.375,48.988) 34.375,49.35 32.425,49.35 cw(c31.5,49.35) 31.5,48.425
  region net GND: 25.475,48.425 25.475,46.975 21.8,46.975 21.8,48.875 22.169,49.244 cw(c22.425,48.988) 22.425,49.35 24.375,49.35 ccw(c25.3,49.35) 25.3,48.425
  region net VUSB: 30.5,48.425 30.5,46.5 30.8,46.225 31.1,46.5 31.1,48.425
  region net VUSB: 25.7,48.425 25.7,46.5 26,46.225 26.3,46.5 26.3,48.425
Bottom Layer:
  region: 38.752,27.368 37.834,25.52 37.531,25.647 37.517,25.686 38.036,26.725 36.037,25.902 39.097,24.642 39.106,24.601 35.568,21.063 32.03,24.601 32.038,24.642 35.098,25.902 33.099,26.725 33.607,25.686 33.593,25.647 33.29,25.52 32.372,27.368 32.4,27.398 35.562,26.094 38.724,27.398 hole: 35.568,25.705 32.635,24.5 34.982,22.159 33.785,24.554 33.799,24.593 34.101,24.72 35.568,21.782 37.034,24.72 37.336,24.593 37.351,24.554 36.153,22.153 38.5,24.5
  region: 10.603,13.849 10.603,14.013 11.498,14.026 11.931,14.031 12.507,14.035 13.12,14.038 13.677,14.039 14.22,14.04 14.621,14.044 14.952,14.048 14.96,14.057 14.967,14.16 15.153,15.537 15.343,16.938 15.357,16.989 15.381,17.019 15.42,17.04 15.468,17.049 15.519,17.043 15.539,17.035 15.559,17.022 15.575,17.006 15.586,16.989 15.596,16.955 15.638,16.673 15.685,16.349 15.737,15.972 15.788,15.599 15.832,15.283 15.872,14.998 15.874,14.993 15.876,14.993 15.877,14.994 15.918,15.282 15.963,15.602 16.015,15.983 16.115,16.705 16.157,16.922 16.203,17.016 16.276,17.051 16.35,17.016 16.397,16.921 16.44,16.703 16.542,15.977 16.595,15.594 16.64,15.274 16.68,14.989 16.681,14.988 16.682,14.989 16.714,15.215 16.825,16.032 16.947,16.931 16.949,16.954 16.96,16.985 16.994,17.018 17.039,17.042 17.082,17.051 17.106,17.048 17.133,17.04 17.158,17.027 17.176,17.013 17.191,16.997 17.203,16.979 17.212,16.963 17.214,16.952 17.215,16.934 17.27,16.517 17.331,16.052 17.404,15.503 17.476,14.955 17.537,14.49 17.592,14.073 17.593,14.058 17.602,14.048 18.184,14.044 18.908,14.04 19.948,14.039 20.917,14.038 21.88,14.035 22.717,14.031 23.216,14.026 24.128,14.013 24.128,13.849 17.417,13.859 17.384,13.906 17.362,13.956 17.33,14.145 17.288,14.426 17.223,14.901 17.173,15.265 17.129,15.574 17.089,15.849 17.083,15.862 17.08,15.863 17.077,15.86 17.036,15.587 16.991,15.277 16.94,14.907 16.844,14.219 16.801,13.99 16.757,13.885 16.691,13.849 16.647,13.854 16.609,13.869 16.58,13.891 16.562,13.92 16.55,13.963 16.421,14.887 16.296,15.781 16.285,15.895 16.281,15.899 16.276,15.896 16.257,15.782 16.221,15.534 16.144,14.967 16.095,14.61 16.053,14.299 16.016,14.032 16.008,13.984 15.99,13.928 15.96,13.886 15.919,13.859 15.871,13.849 15.8,13.885 15.754,13.984 15.711,14.208 15.614,14.907 15.562,15.277 15.517,15.587 15.476,15.86 15.473,15.863 15.47,15.862 15.464,15.849 15.424,15.574 15.38,15.265 15.331,14.901 15.265,14.422 15.223,14.142 15.191,13.957 15.17,13.906 15.136,13.859
  region: 4.52,13.849 4.533,13.892 4.562,13.966 4.655,14.154 4.752,14.342 4.822,14.465 4.97,14.691 5.141,14.917 5.32,15.124 5.491,15.29 5.645,15.416 5.821,15.542 5.987,15.649 6.053,15.668 6.086,15.646 6.221,15.337 6.349,15.027 6.445,14.761 6.478,14.659 6.585,14.865 6.79,15.214 7.023,15.532 7.283,15.816 7.566,16.062 7.651,16.123 7.769,16.196 7.889,16.265 7.924,16.274 7.935,16.268 7.967,16.214 8.003,16.148 8.042,16.07 8.121,15.899 8.179,15.764 8.234,15.617 8.31,15.397 8.398,15.136 8.506,15.287 8.62,15.433 8.761,15.592 8.911,15.744 9.048,15.866 9.16,15.95 9.312,16.051 9.466,16.149 9.507,16.16 9.516,16.156 9.54,16.116 9.568,16.068 9.598,16.01 9.743,15.694 9.875,15.344 9.989,14.974 10.081,14.602 10.12,14.408 10.162,14.178 10.2,13.956 10.205,13.886 10.18,13.86 9.831,13.854 9.219,13.85 7.363,13.849
  region: -6.315,15.242 -6.332,15.242 -6.332,15.225 -6.297,15.224 -6.297,15.242 -6.297,15.259 -6.315,15.259
  region: 570 vertices and 0 holes, not listed, extent -7.275,12.867 -6.181,15.736
  region: 380 vertices and 0 holes, not listed, extent -8.377,15.277 -6.314,16.736
  region: 638 vertices and 0 holes, not listed, extent -10.162,12.752 -6.878,15.136
  region: 460 vertices and 0 holes, not listed, extent -10.087,14.791 -8.284,16.793

## Silkscreen, mask and mechanical layers (free items; w line width, h text height)
Top Overlay:
  text "+" at -22.323,25.53 h1.5
Bottom Overlay:
  drawing of 44 lines, arcs and shapes, not listed
  text "Amplifier" at -17,48.75 h2.5
  text "MAX98357A / 3.2W @ 4Ω / 1.8W @ 8Ω" at -17,43.315 h2.5
  text "IO47" at -27.25,40.5 h2.5
  text "I²S WS :" at -16.75,40.5 h2.5
  text "IO17" at -27.25,38.75 h2.5
  text "I²S SCK :" at -16.75,38.75 h2.5
  text "MIC" at -11.25,38.75 h2.5
  text "IO15" at -27.25,37 h2.5
  text "I²S SD :" at -16.75,37 h2.5
  text "IO16" at -27.25,35.25 h2.5
  text "I²S DIN :" at -16.75,35.25 h2.5
  text "IO02" at -27.25,33.5 h2.5
  text "I²S BCK :" at -16.75,33.5 h2.5
  text "AMP" at -11.25,33.5 h2.5
  text "IO47" at -27.25,31.75 h2.5
  text "I²S LRCK :" at -16.75,31.75 h2.5
  text "IO18" at -27.25,26.25 h2.5
  text "I²C SCL :" at -16.75,26.25 h2.5
  text "IO09" at -27.25,24.5 h2.5
  text "I²C SDA :" at -16.75,24.5 h2.5
  text "IO44" at -27.25,21 h2.5
  text "MCU Tx :" at -16.75,21 h2.5
  text "IO43" at -27.25,19.25 h2.5
  text "MCU Rx :" at -16.75,19.25 h2.5
  text "GND" at -6.85,8.29 h1.5 r270
  text "44" at -4.31,8.29 h1.5 r270
  text "47" at -1.77,8.29 h1.5 r270
  text "15" at 0.77,8.29 h1.5 r270
  text "SDA" at 3.31,8.29 h1.5 r270
  text "VSYS" at 5.85,8.29 h1.5 r270
  text "Wim" at -28.5,8 h2 r351
  text ".PCB_TITLE / Rev. .PCB_Rev" at 39.499,3.487 h2.5 r359.98
  text "3V" at -6.85,-0.29 h1.5 r270
  text "43" at -4.31,-0.29 h1.5 r270
  text "2" at -1.77,-0.29 h1.5 r270
  text "16" at 0.77,-0.29 h1.5 r270
  text "17" at 3.31,-0.29 h1.5 r270
  text "SCL" at 5.85,-0.29 h1.5 r270
Board Outline:
  lines w0.1: -47.5,-52 cw(c-47.5,-50) -49.5,-50 -49.5,1 cw(c-47.5,1) -47.5,3 -45.77,3 ccw(c-45.77,6.066) -43.602,3.898 -43.5,4 -43.398,4.102 ccw(c-45.566,6.27) -42.5,6.27 -42.5,8.02 -42.5,45.23 cw(c-39.434,45.23) -41.602,47.398 -35.898,53.102 cw(c-33.73,50.934) -33.73,54 33.73,54 cw(c33.73,50.934) 35.898,53.102 40.352,48.648 cw(c38.184,46.48) 41.25,46.48 41.25,7.561 41.25,7.52 ccw(c44.316,7.52) 42.148,5.352 43.5,4 43.602,3.898 ccw(c45.77,6.066) 45.77,3 47.5,3 cw(c47.5,1) 49.5,1 49.5,-50 cw(c47.5,-50) 47.5,-52 ; -47.5,-52 47.5,-52 ; -7.75,32.73 cw(c-6.48,32.73) -6.48,34 -2.27,34 cw(c-2.27,32.73) -1,32.73 -1,23.593 cw(c-2.071,23.593) -2.071,22.523 ; -7.75,32.75 -7.75,30 ccw(c0,30) -2.068,22.531 ; -7.75,37.25 -7.75,40 cw(c0,40) -2.068,47.469 ; -7.75,37.27 ccw(c-6.48,37.27) -6.48,36 -2.27,36 ccw(c-2.27,37.27) -1,37.27 -1,46.407 ccw(c-2.071,46.407) -2.071,47.477 ; 2.068,22.531 ccw(c0,30) 7.75,30 7.75,32.75 ; 2.068,47.469 cw(c0,40) 7.75,40 7.75,37.25 ; 2.071,22.523 cw(c2.071,23.593) 1,23.593 1,32.73 cw(c2.27,32.73) 2.27,34 6.48,34 cw(c6.48,32.73) 7.75,32.73 ; 2.071,47.478 ccw(c2.071,46.407) 1,46.407 1,37.27 ccw(c2.27,37.27) 2.27,36 6.48,36 ccw(c6.48,37.27) 7.75,37.27
Comments:
  drawing of 618 lines, arcs and shapes, not listed
Fabrication:
  text "White Solder Mask" at -111,-32.5 h1.5
  text "Black Silkscreen" at -111,-35.5 h1.5
  text "1.6mm Thickness" at -111,-41.5 h1.5
Stencil:
  region: 15,77.5 ccw(c15,80) 17.5,80 ccw(c15,80) 15,82.5 ccw(c15,80) 12.5,80 ccw(c15,80)
  region: -15,77.5 ccw(c-15,80) -12.5,80 ccw(c-15,80) -15,82.5 ccw(c-15,80) -17.5,80 ccw(c-15,80)
  lines w0.15: -69.5,-100.5 69.5,-100.5 69.5,99 -69.5,99 -69.5,-100.5
Frame:
  drawing of 15 lines, arcs and shapes, not listed
  text "Document" at 180.402,-99.311 h2
  text ".PCB_TITLE" at 181.902,-104.811 h3.2
  text "Layer Name" at 180.402,-109.311 h2
  text "Date" at 180.402,-119.311 h2
  text "Rev" at 220.402,-119.311 h2
  text ".Print_Date" at 183.402,-124.811 h3.5
  text ".PCB_REV" at 224.902,-124.811 h4
  text "Desginer" at 130.402,-129.311 h2
  text "Document" at 180.402,-129.311 h2
  text ".Pcb_File_Name_No_Path" at 181.902,-134.311 h1.5
  text ".PCB_ENGINEER" at 134.902,-134.811 h4
Drill Drawing:
  circle w0.15: c82.744,32.91 r0.444
  lines w0.15: 81.497,23.866 205.536,23.866 ; 81.497,41.866 205.536,41.866 ; 88.895,21.866 88.895,43.866 ; 96.926,21.866 96.926,43.866 ; 111.889,21.866 111.889,43.866 ; 118.687,21.866 118.687,43.866 ; 128.524,21.866 128.524,43.866 ; 148.552,21.866 148.552,43.866 ; 156.47,21.866 156.47,43.866 ; 166.467,21.866 166.467,43.866 ; 175.185,21.866 175.185,43.866 ; 186.781,21.866 186.781,43.866 ; 81.497,21.866 205.536,21.866 205.536,43.866 81.497,43.866 81.497,21.866 ; 82.299,25.355 83.188,25.355 82.744,24.466 82.299,25.355 ; 82.299,26.466 83.188,26.466 83.188,27.355 82.299,27.355 82.299,26.466 ; 82.299,28.466 82.744,28.688 83.188,28.466 82.966,28.91 83.188,29.355 82.744,29.132 82.299,29.355 82.521,28.91 82.299,28.466 ; 82.299,30.91 82.744,30.466 83.188,30.91 82.744,31.355 82.299,30.91 ; 82.299,34.688 82.521,34.688 82.744,34.466 82.966,34.688 83.188,34.688 82.966,34.91 83.188,35.132 82.966,35.132 82.744,35.355 82.521,35.132 82.299,35.132 82.521,34.91 82.299,34.688 ; 82.299,36.466 82.299,36.688 82.521,36.91 82.299,37.132 82.299,37.355 82.521,37.355 82.744,37.132 82.966,37.355 83.188,37.355 83.188,37.132 82.966,36.91 83.188,36.688 83.188,36.466 82.966,36.466 82.744,36.688 82.521,36.466 82.299,36.466 ; 82.299,38.466 83.188,38.466 83.188,39.355 82.299,39.355 82.299,38.466 ; 82.299,40.688 82.521,40.688 82.521,40.466 82.966,40.466 82.966,40.688 83.188,40.688 83.188,41.132 82.966,41.132 82.966,41.355 82.521,41.355 82.521,41.132 82.299,41.132 82.299,40.688 ; 82.477,38.644 83.01,38.644 83.01,39.177 82.477,39.177 82.477,38.644
  text "Symbol" at 82.697,42.466 h0.96
  text "Count" at 89.495,42.466 h0.96
  text "Hole Size" at 97.526,42.466 h0.96
  text "Plated" at 112.489,42.466 h0.96
  text "Hole Type" at 119.287,42.466 h0.96
  text "Drill Layer Pair" at 129.124,42.466 h0.96
  text "Via/Pad" at 149.152,42.466 h0.96
  text "Pad Shape" at 157.07,42.466 h0.96
  text "Template" at 167.067,42.466 h0.96
  text "Hole Length" at 175.785,42.466 h0.96
  text "Routed Path Length" at 187.381,42.466 h0.96
  text "1" at 89.495,40.466 h0.8
  text "0.500mm (19.69mil)" at 97.526,40.466 h0.8
  text "NPTH" at 112.489,40.466 h0.8
  text "Round" at 119.287,40.466 h0.8
  text "Top Layer - Bottom Layer" at 129.124,40.466 h0.8
  text "Pad" at 149.152,40.466 h0.8
  text "Rounded" at 157.07,40.466 h0.8
  text "c50hn50" at 167.067,40.466 h0.8
  text "-" at 175.785,40.466 h0.8
  text "-" at 187.381,40.466 h0.8
  text "2" at 89.495,38.466 h0.8
  text "0.650mm (25.59mil)" at 97.526,38.466 h0.8
  text "NPTH" at 112.489,38.466 h0.8
  text "Round" at 119.287,38.466 h0.8
  text "Top Layer - Bottom Layer" at 129.124,38.466 h0.8
  text "Pad" at 149.152,38.466 h0.8
  text "Rounded" at 157.07,38.466 h0.8
  text "c65hn65" at 167.067,38.466 h0.8
  text "-" at 175.785,38.466 h0.8
  text "-" at 187.381,38.466 h0.8
  text "2" at 89.495,36.466 h0.8
  text "1.200mm (47.24mil)" at 97.526,36.466 h0.8
  text "PTH" at 112.489,36.466 h0.8
  text "Round" at 119.287,36.466 h0.8
  text "Top Layer - Bottom Layer" at 129.124,36.466 h0.8
  text "Pad" at 149.152,36.466 h0.8
  text "Rounded" at 157.07,36.466 h0.8
  text "c120h120" at 167.067,36.466 h0.8
  text "-" at 175.785,36.466 h0.8
  text "-" at 187.381,36.466 h0.8
  text "2" at 89.495,34.466 h0.8
  text "1.270mm (50.00mil)" at 97.526,34.466 h0.8
  text "NPTH" at 112.489,34.466 h0.8
  text "Round" at 119.287,34.466 h0.8
  text "Top Layer - Bottom Layer" at 129.124,34.466 h0.8
  text "Pad" at 149.152,34.466 h0.8
  text "Rounded" at 157.07,34.466 h0.8
  text "c127hn127" at 167.067,34.466 h0.8
  text "-" at 175.785,34.466 h0.8
  text "-" at 187.381,34.466 h0.8
  text "2" at 89.495,32.466 h0.8
  text "2.200mm (86.61mil)" at 97.526,32.466 h0.8
  text "NPTH" at 112.489,32.466 h0.8
  text "Round" at 119.287,32.466 h0.8
  text "Top Layer - Bottom Layer" at 129.124,32.466 h0.8
  text "Pad" at 149.152,32.466 h0.8
  text "Rounded" at 157.07,32.466 h0.8
  text "c220hn220" at 167.067,32.466 h0.8
  text "-" at 175.785,32.466 h0.8
  text "-" at 187.381,32.466 h0.8
  text "2" at 89.495,30.466 h0.8
  text "3.000mm (118.11mil)" at 97.526,30.466 h0.8
  text "NPTH" at 112.489,30.466 h0.8
  text "Round" at 119.287,30.466 h0.8
  text "Top Layer - Bottom Layer" at 129.124,30.466 h0.8
  text "Pad" at 149.152,30.466 h0.8
  text "Rounded" at 157.07,30.466 h0.8
  text "c300hn300" at 167.067,30.466 h0.8
  text "-" at 175.785,30.466 h0.8
  text "-" at 187.381,30.466 h0.8
  text "8" at 89.495,28.466 h0.8
  text "2.500mm (98.43mil)" at 97.526,28.466 h0.8
  text "NPTH" at 112.489,28.466 h0.8
  text "Round" at 119.287,28.466 h0.8
  text "Top Layer - Bottom Layer" at 129.124,28.466 h0.8
  text "Pad" at 149.152,28.466 h0.8
  text "Rounded" at 157.07,28.466 h0.8
  text "(Mixed)" at 167.067,28.466 h0.8
  text "-" at 175.785,28.466 h0.8
  text "-" at 187.381,28.466 h0.8
  text "14" at 89.495,26.466 h0.8
  text "0.900mm (35.43mil)" at 97.526,26.466 h0.8
  text "PTH" at 112.489,26.466 h0.8
  text "Round" at 119.287,26.466 h0.8
  text "Top Layer - Bottom Layer" at 129.124,26.466 h0.8
  text "Pad" at 149.152,26.466 h0.8
  text "(Mixed)" at 157.07,26.466 h0.8
  text "(Mixed)" at 167.067,26.466 h0.8
  text "-" at 175.785,26.466 h0.8
  text "-" at 187.381,26.466 h0.8
  text "191" at 89.495,24.466 h0.8
  text "0.250mm (9.84mil)" at 97.526,24.466 h0.8
  text "PTH" at 112.489,24.466 h0.8
  text "Round" at 119.287,24.466 h0.8
  text "Top Layer - Bottom Layer" at 129.124,24.466 h0.8
  text "Via" at 149.152,24.466 h0.8
  text "Rounded" at 157.07,24.466 h0.8
  text "v60h25m45" at 167.067,24.466 h0.8
  text "-" at 175.785,24.466 h0.8
  text "-" at 187.381,24.466 h0.8
  text "224 Total" at 89.495,22.466 h0.8

## Dimensions
-33.73,54 to -47.5,-52 on Fabrication
-49.5,-50 to 49.5,-50 on Fabrication

## Text inside footprints (layer, text, board x,y; h text height)
J1: Comments "PCB Edge" at 30.7,54.75 h0.61 r180